# EAGLE board Schematic (EAGLE 8.7.1)
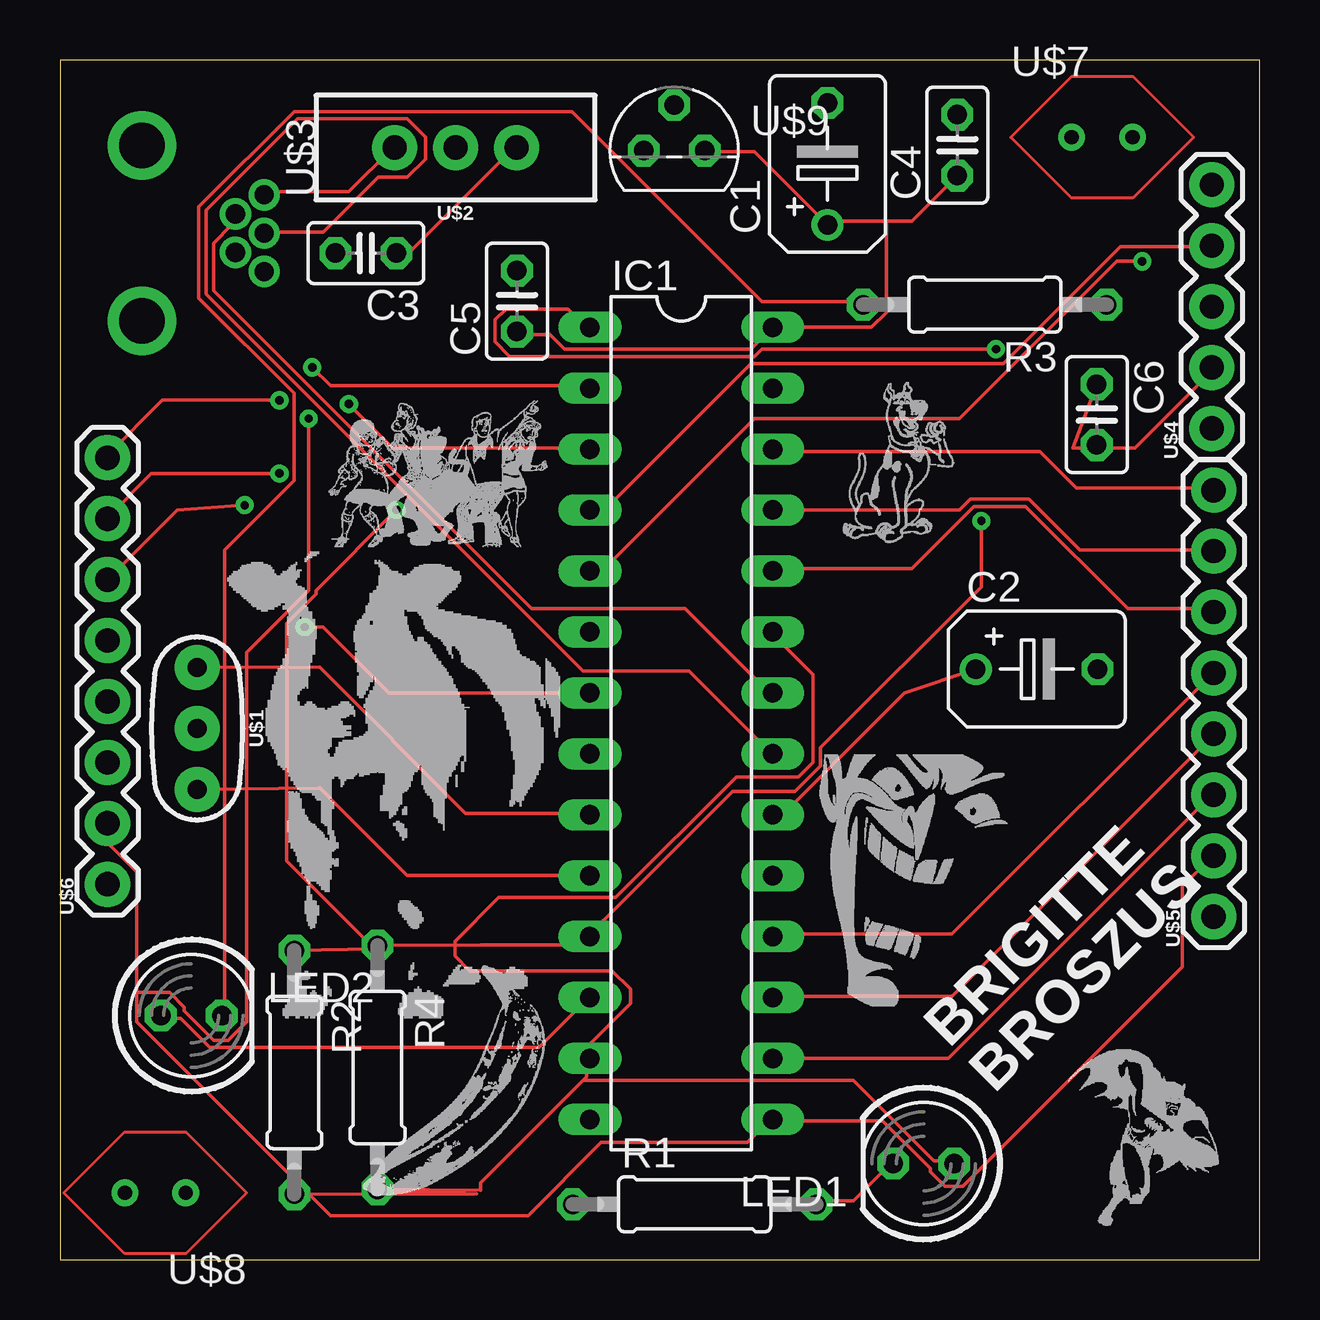
[diagram p0: board, top side]
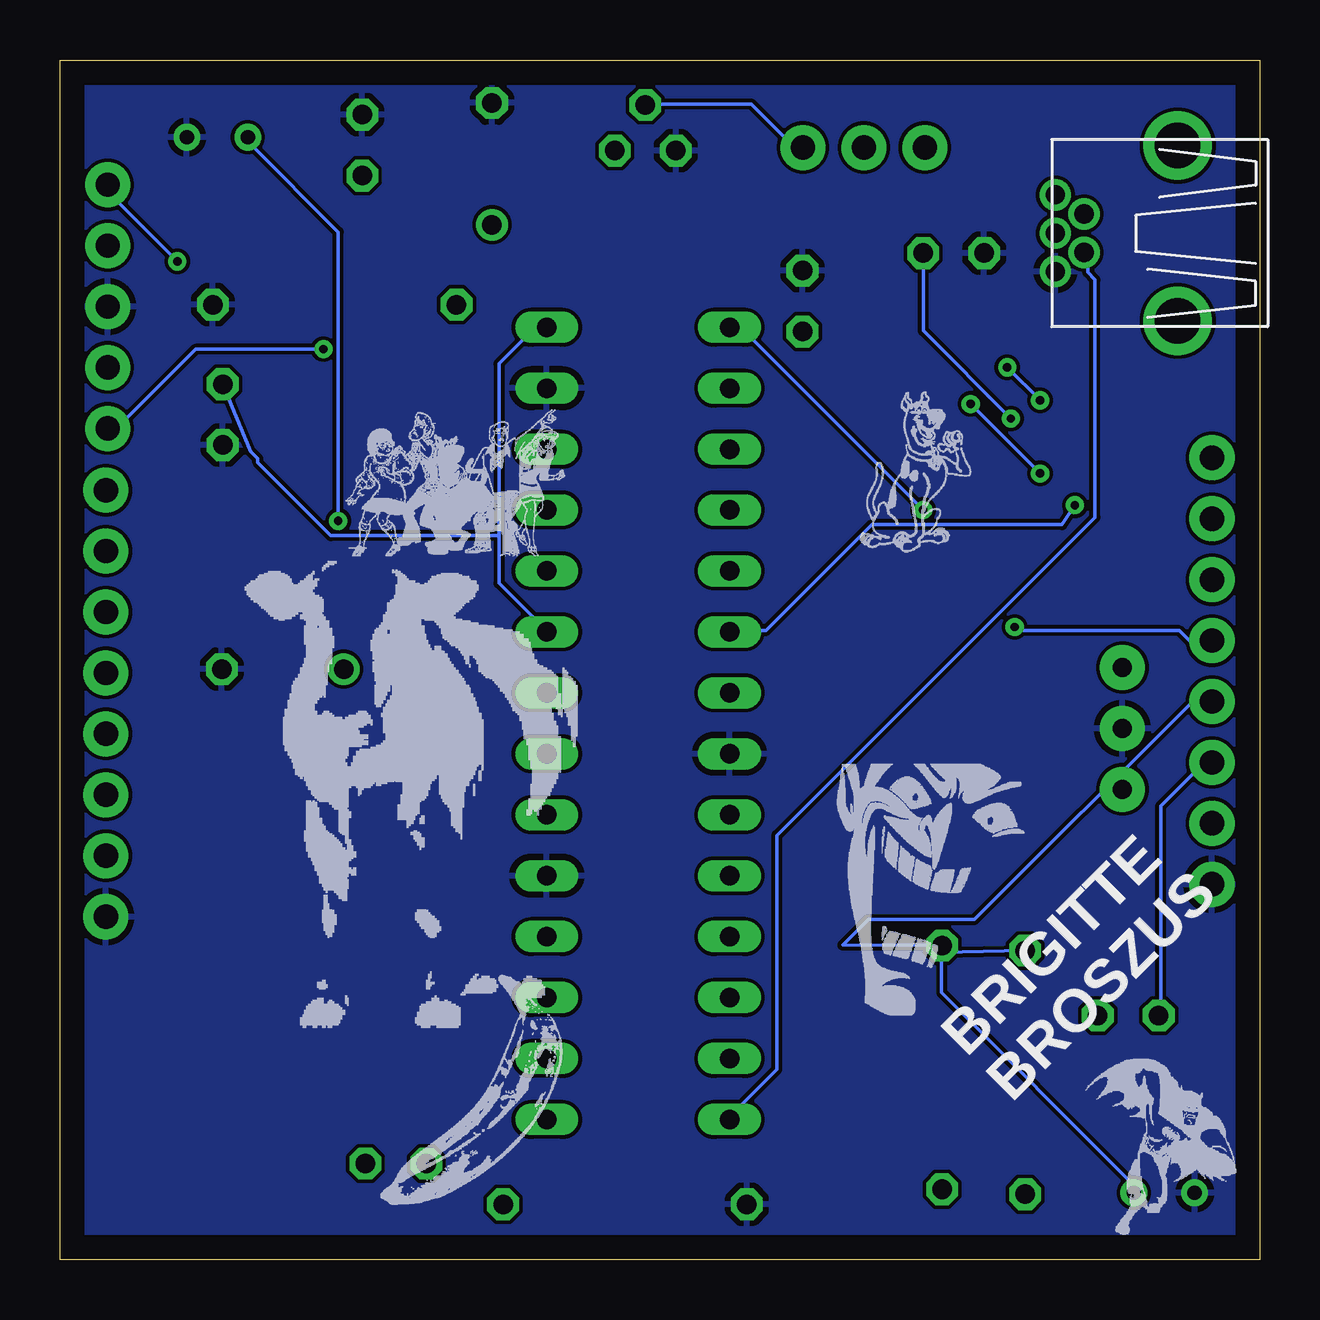
[diagram p1: board, bottom side, seen from below]

Size 50 x 50 mm. Coordinates in mm from the lower left corner, seen from the top.
Outline: 0,0 50,0 50,50 0,50 0,0
Copper layers (1*16): Top 0.035mm / dielectric 1.5mm / Bottom 0.035mm
Design rules "default": minimum track width 6mil, minimum drill 0.35mm, track to track 6mil, track to pad 6mil, pad to pad 6mil, via to via 6mil, smd to smd 6mil, copper to edge 40mil, drill to drill 6mil, minimum pad ring 10mil, minimum via ring 8mil, stop-mask expansion 4mil, vias tented up to drill 0mil, thermal gap 10mil

## Footprints (pad centres in the part's own frame; a part is rotated, then mirrored left to right if it is on the bottom)
B45181B = drill 0.813: + -2.54,0 | drill 0.813 octagon: - 2.54,0
C025-025X050 = drill 0.813 octagon: 1 -1.27,0; 2 1.27,0
DIL28-3 = drill 0.813 long: 1 -16.51,-3.81; 2 -13.97,-3.81; 3 -11.43,-3.81; 4 -8.89,-3.81; 5 -6.35,-3.81; 6 -3.81,-3.81; 7 -1.27,-3.81; 8 1.27,-3.81; 9 3.81,-3.81; 10 6.35,-3.81; 11 8.89,-3.81; 12 11.43,-3.81; 13 13.97,-3.81; 14 16.51,-3.81; 15 16.51,3.81; 16 13.97,3.81; 17 11.43,3.81; 18 8.89,3.81; 19 6.35,3.81; 20 3.81,3.81; 21 1.27,3.81; 22 -1.27,3.81; 23 -3.81,3.81; 24 -6.35,3.81; 25 -8.89,3.81; 26 -11.43,3.81; 27 -13.97,3.81; 28 -16.51,3.81
LED5MM = drill 0.813 octagon: A -1.27,0; K 1.27,0
0207/10 = drill 0.813 octagon: 1 -5.08,0; 2 5.08,0
RESONATOR-PTH-7.6X3.8 = drill 0.8 pad 1.88: 1 -2.54,0; 2 0,0; 3 2.54,0
SWITCH_SPDT_PTH_11.6X4.0MM = drill 1.016 pad 1.88: 1 0,2.54; 2 0,0; 3 0,-2.54
USB-MB-H = drill 0.8: D+ 5.1,0; D- 3.9,0.8; GND 5.1,-1.6; ID 3.9,-0.8; VBUS 5.1,1.6 | drill 1.9: P$6 0,-3.65; P$7 0,3.65
1X05 = drill 1.016 pad 1.88: 1 0,0; 2 2.54,0; 3 5.08,0; 4 7.62,0; 5 10.16,0
1X08 = drill 1.016 pad 1.88: 1 0,0; 2 2.54,0; 3 5.08,0; 4 7.62,0; 5 10.16,0; 6 12.7,0; 7 15.24,0; 8 17.78,0
RDT1034 = drill 0.6: P$1 -1.27,0; P$2 1.27,0
TO92 = drill 0.813 octagon: 1 -1.27,0; 2 0,1.905; 3 1.27,0

## Placement (x,y rotation side)
C1  [B45181B]  31.99,45.67 90 top
C2  [B45181B]  40.71,24.61 0 top
C3  [C025-025X050]  12.75,41.95 180 top
C4  [C025-025X050]  37.4,46.45 90 top
C5  [C025-025X050]  19.05,39.95 90 top
C6  [C025-025X050]  43.22,35.22 270 top
IC1  [DIL28-3]  25.9,22.35 270 top
LED1  [LED5MM]  36,4 180 top
LED2  [LED5MM]  5.47,10.17 0 top
R1  [0207/10]  26.45,2.3 0 top
R2  [0207/10]  9.77,7.8 270 top
R3  [0207/10]  38.55,39.8 180 top
R4  [0207/10]  13.23,8.01 270 top
U$1  RESONATOR  [RESONATOR-PTH-7.6X3.8]  5.72,22.14 270 top
U$2  SLIDESWITCH  [SWITCH_SPDT_PTH_11.6X4.0MM]  16.49,46.35 90 top
U$3  USB_MINI  [USB-MB-H]  3.41,42.78 0 top
U$4  PICKIT3  [1X05]  48.01,34.64 90 top
U$5  CONN-08-1  [1X08]  48.09,14.29 90 top
U$6  CONN-08-2  [1X08]  1.98,15.64 90 top
U$7  PUSHBUTTON  [RDT1034]  43.44,46.78 0 top
U$8  PUSHBUTTON  [RDT1034]  3.97,2.78 180 top
U$9  MCP1702  [TO92]  25.6,46.22 0 top

## Library data of the parts
C1-C6 IC1 LED1 LED2 R1-R4 U$1-U$9 = ME433_PIC32circuit

## Nets
3.OUT: U$2.2
+3V3: C1.+ C4.1 C5.1 C6.1 IC1.13 IC1.23 IC1.28 LED1.A R2.2 R4.2 U$4.2 U$9.3
+5V: C3.1 IC1.15 U$2.3 U$5.2 U$6.2 U$9.2
A0: IC1.2 U$6.8
A1: IC1.3 U$6.7
A4/LED: IC1.12 LED2.A U$6.3
B2: IC1.6 U$6.6
B3: IC1.7 U$6.5
B4/USER: IC1.11 R4.1 U$6.4 U$7.P$1
B7: IC1.16 U$5.3
B8: IC1.17 U$5.4
B9: IC1.18 U$5.5
B13: IC1.24 U$5.6
B14: IC1.25 U$5.7
B15: IC1.26 U$5.8
D+: IC1.21 U$3.D+
D-: IC1.22 U$3.D-
GND: C1.- C2.- C3.2 C4.2 C5.2 C6.2 IC1.8 IC1.19 IC1.27 R1.1 R3.1 U$1.2 U$3.GND U$4.3 U$5.1 U$6.1 U$7.P$2 U$8.P$2 U$9.1
MCLR: IC1.1 R2.1 U$4.1 U$8.P$1
N$5: C2.+ IC1.20
N$10: IC1.10 U$1.3
N$11: IC1.9 U$1.1
N$15: LED2.K R3.2
N$16: LED1.K R1.2
N$20: U$2.1 U$3.VBUS
PGC: IC1.5 U$4.5
PGD: IC1.4 U$4.4
USBID: IC1.14 U$3.ID

## Tracks (layer width: path | path; a pad name or v marks a point on that pad's centre or on a via)
+3V3
  Top 0.152: R2.2 13.26,2.74 17.37,2.74 R4.2 17.53,2.9 17.53,3.2 21.79,7.47 | 21.79,7.47 21.95,7.62 21.95,8.23 IC1.13 22.1,8.99 23.77,10.67 23.77,11.28 23.01,12.04 17.07,12.04 16.46,12.65 16.46,13.26 18.29,15.09 23.16,15.09 28.19,20.12 30.79,20.12 31.39,20.73 31.39,24.38 29.72,26.06 IC1.23 | 21.79,7.47 33.07,7.47 36.42,4.12 37.19,4.12 LED1.A | 34.44,43.28 35.51,43.28 37.34,45.11 C4.1 | 34.44,43.28 32,43.28 C1.+ 31.85,43.28 28.96,46.18 26.98,46.18 U$9.3 | C6.1 42.22,33.83 44.81,33.83 48.01,37.03 U$4.2 | C5.1 19.05,38.56 20.42,38.56 21.03,37.95 28.8,37.95 29.57,38.71 IC1.28 33.83,38.86 34.44,39.47 34.44,43.28
  Bottom 0.152: 31.7,30.18 31.7,37.34 30.33,38.71 29.72,38.71 IC1.28 | 31.7,30.18 31.7,28.19 29.72,26.21 IC1.23 | 31.7,30.18 38.71,30.18 41.76,33.22 41.76,33.38 42.06,33.68 C6.1
+5V  (via drill 0.35)
  Top 0.152: C3.1 14.02,42.06 14.63,42.06 18.9,46.33 U$2.3 | U$5.2 48.01,16.76 46.79,15.54 46.79,12.19 37.64,3.05 36.88,3.05 36.27,3.66 36.27,3.81 34.29,5.79 29.72,5.79 IC1.15 29.57,5.79 28.65,4.88 22.55,4.88 19.51,1.83 11.28,1.83 3.2,9.91 3.2,11.12 | 3.2,11.12 3.2,16.15 1.98,17.37 1.98,18.14 U$6.2 | v10.36,35.05 10.36,27.89 7.77,25.3 7.77,9.91 7.01,9.14 6.4,9.14 5.18,10.36 5.18,10.52 4.57,11.12 3.2,11.12
  Bottom 0.152: U$9.2 25.45,48.16 21.18,48.16 19.51,46.48 19.05,46.48 U$2.3 | v10.36,35.05 14.02,38.71 14.02,41.91 C3.1
A0  (via drill 0.35)
  Top 0.152: v10.52,37.19 11.28,36.42 21.95,36.42 IC1.2 | v9.14,35.81 4.27,35.81 1.98,33.53 U$6.8
  Bottom 0.152: v9.14,35.81 v10.52,37.19
A1  (via drill 0.35)
  Top 0.152: v12.04,35.66 13.87,33.83 21.95,33.83 IC1.3 | v9.14,32.77 3.81,32.77 1.98,30.94 U$6.7
  Bottom 0.152: v9.14,32.77 v12.04,35.66
A4/LED
  Top 0.152: LED2.A 4.27,10.06 5.03,10.06 6.25,8.84 19.96,8.84 21.95,10.82 IC1.12
  Bottom 0.152: U$6.3 1.98,20.57 2.44,20.57 4.12,18.9 4.12,10.21 LED2.A
B2  (via drill 0.35)
  Top 0.152: v7.7,31.45 4.88,31.24 U$6.6
  Bottom 0.152: v7.7,31.45 8.23,30.63 16.15,30.63 20.57,26.21 21.95,26.21 IC1.6
B3  (via drill 0.35)
  Top 0.152: v10.21,26.36 10.97,26.36 13.72,23.62 21.95,23.62 IC1.7
  Bottom 0.152: v10.21,26.36 10.06,26.21 3.35,26.21 2.9,25.76 1.98,25.76 U$6.5
B4/USER  (via drill 0.35)
  Top 0.152: v38.41,30.79 38.41,28.04 31.7,21.34 31.7,20.57 30.63,19.51 28.04,19.51 22.1,13.56 IC1.11 21.95,13.41 21.64,13.11 17.53,13.11 R4.1
  Bottom 0.152: v38.41,30.79 38.41,42.82 42.06,46.48 42.06,46.63 U$7.P$1 | U$6.4 1.98,23.16 2.9,23.16 11.89,14.17 16.31,14.17 17.37,13.11 R4.1
B7
  Top 0.152: IC1.16 37.03,8.38 48.01,19.36 U$5.3
B8
  Top 0.152: IC1.17 29.72,10.97 37.19,10.97 48.01,21.79 U$5.4
B9
  Top 0.152: IC1.18 29.72,13.56 37.19,13.56 48.01,24.38 U$5.5
B13
  Top 0.152: IC1.24 29.72,28.8 35.51,28.8 38.1,31.39 40.23,31.39 44.5,27.13 48.01,27.13 U$5.6
B14
  Top 0.152: IC1.25 37.49,31.24 37.95,31.7 40.39,31.7 42.52,29.57 48.01,29.57 U$5.7
B15
  Top 0.152: IC1.26 29.72,33.68 40.84,33.68 42.37,32.16 48.01,32.16 U$5.8
D+
  Top 0.152: U$3.D+ 8.53,42.82 10.97,42.82 13.26,45.11 14.48,45.11 15.24,45.87 15.24,46.79 14.48,47.55 9.91,47.55 6.1,43.74 6.1,40.23 21.79,24.54 26.21,24.54 29.57,21.18 IC1.21
D-
  Top 0.152: U$3.D- 7.16,43.43 7.16,43.13 6.4,42.37 6.4,40.39 19.66,27.13 26.06,27.13 29.57,23.62 IC1.22
GND
  pour Bottom: 0.5,49.5 0.5,0.5 49.5,0.5 49.5,49.5
MCLR  (via drill 0.35)
  Top 0.152: v14.02,31.24 10.67,27.89 10.67,27.74 9.45,26.52 9.45,16.61 13.11,12.95 R2.1 | v39.01,37.95 29.26,37.95 28.96,37.64 18.75,37.64 18.14,38.25 18.14,39.17 18.59,39.62 21.18,39.62 21.95,38.86 IC1.1
  Bottom 0.152: U$8.P$1 5.33,2.9 5.33,3.2 13.26,11.12 13.26,12.8 R2.1 | v14.02,31.24 21.49,38.71 21.95,38.71 IC1.1 | v39.01,37.95 44.35,37.95 47.55,34.75 48.01,34.75 U$4.1
N$5
  Top 0.152: IC1.20 29.72,18.59 30.18,18.59 35.2,23.62 C2.+
N$10
  Top 0.152: IC1.10 21.95,16 14.48,16 10.82,19.66 U$1.3
N$11
  Top 0.152: IC1.9 21.95,18.59 16.92,18.59 10.82,24.69 U$1.1
N$15
  Top 0.152: LED2.K 6.86,10.21 6.86,29.57 9.75,32.46 9.75,36.12 5.79,40.08 5.79,43.89 9.75,47.85 21.34,47.85 29.26,39.93 33.38,39.93 R3.2
N$16
  Top 0.152: R1.2 31.55,2.44 33.07,2.44 34.59,3.96 LED1.K
N$20
  Top 0.152: U$3.VBUS 8.53,44.5 12.04,44.5 13.87,46.33 U$2.1
PGC  (via drill 0.35)
  Top 0.152: v45.11,41.6 44.04,41.6 37.49,35.05 28.96,35.05 22.71,28.8 22.1,28.8 IC1.5
  Bottom 0.152: v45.11,41.6 48.16,44.65 U$4.5
PGD
  Top 0.152: IC1.4 22.71,31.24 28.8,37.34 39.32,37.34 44.2,42.22 48.01,42.22 U$4.4
USBID
  Bottom 0.152: U$3.ID 7.16,41.91 7.16,41.15 6.86,40.84 6.86,30.94 20.12,17.68 20.12,7.92 22.1,5.94 IC1.14

## Text on the board
tPlace: BRIGITTE / BROSZUS
bPlace: BRIGITTE / BROSZUS